# EAGLE board GameboyCartridgeKS (EAGLE 6.3)
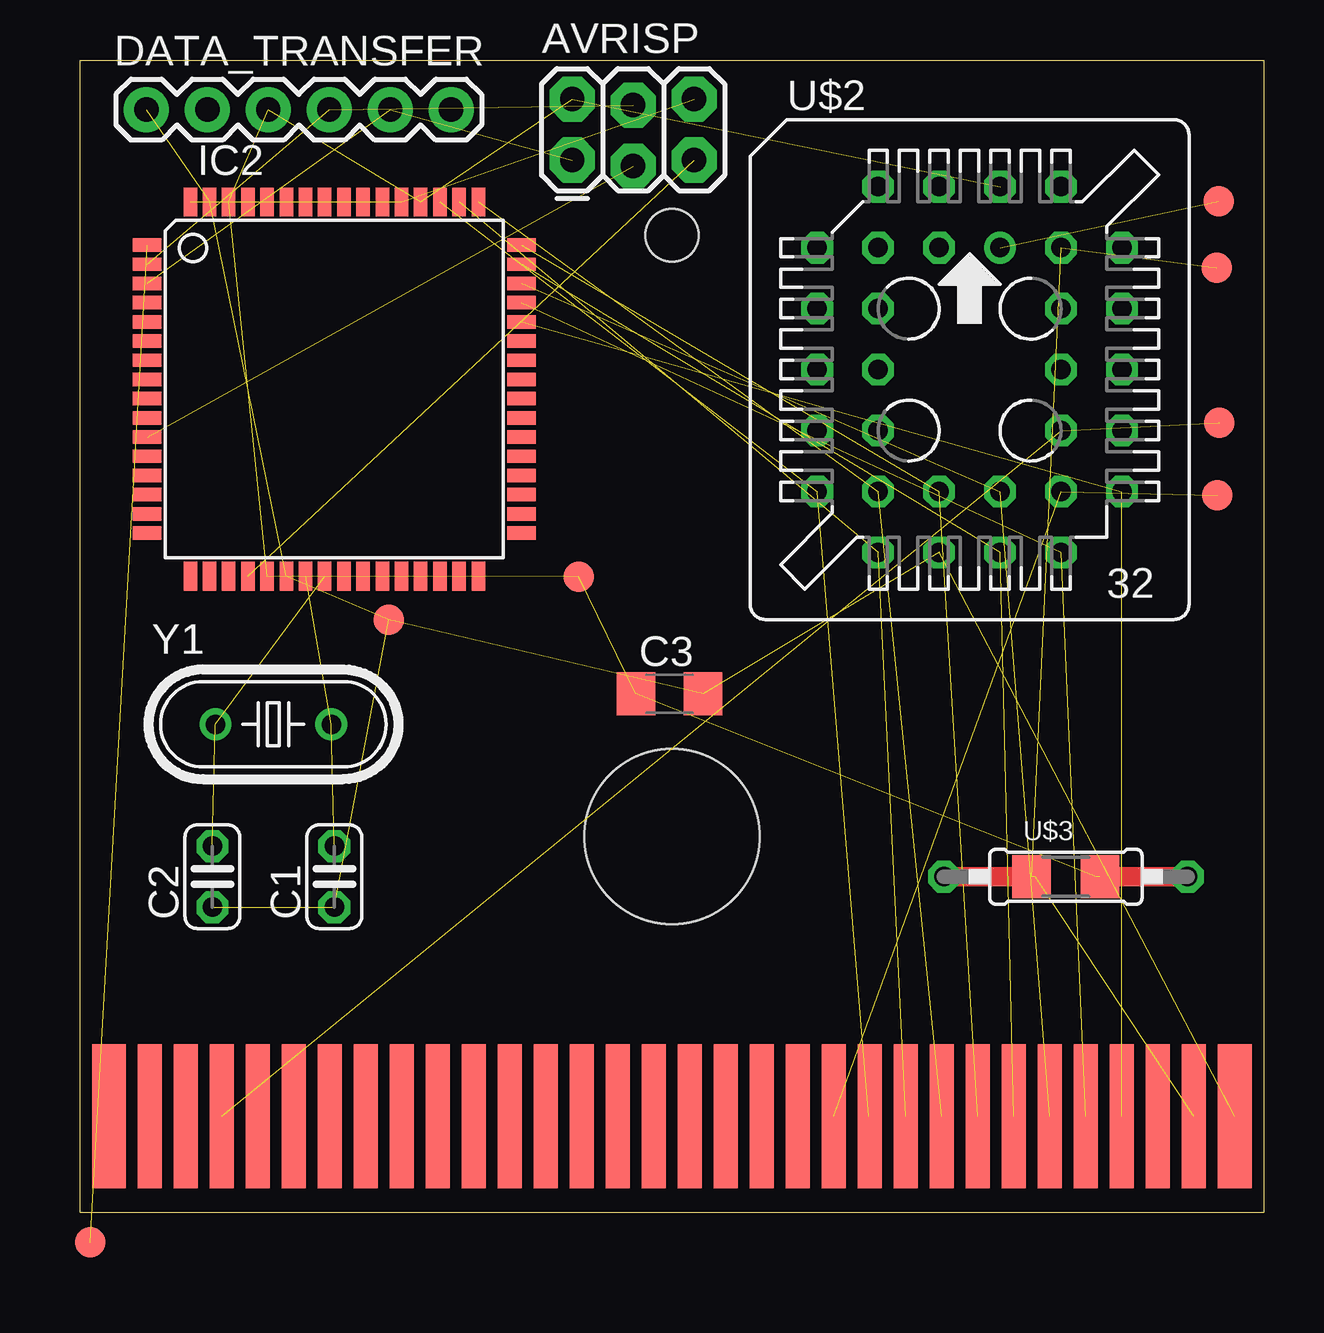
[diagram p0: board, top side]

Size 49.3 x 48 mm. Coordinates in mm from the lower left corner, seen from the top.
Outline: 49.3,48 49.3,0 0,0 0,48 49.3,48
Copper layers (1*16): Top 0.035mm / dielectric 1.5mm / Bottom 0.035mm
Design rules "default": minimum track width 6mil, minimum drill 12mil, track to track 6mil, track to pad 6mil, pad to pad 6mil, via to via 6mil, smd to smd 0mil, copper to edge 10mil, drill to drill 10mil, minimum pad ring 10mil, minimum via ring 6mil, stop-mask expansion 2mil, vias tented up to drill 100mil, thermal gap 10mil
Holes 7.3 mm at 24.65,15.65
Holes 2.2 mm at 24.65,40.7

## Footprints (pad centres in the part's own frame; a part is rotated, then mirrored left to right if it is on the bottom)
2X3_LOCK = drill 1.016 pad 1.88 octagon: 1 0,0; 2 0,2.54; 3 2.54,-0.254; 4 2.54,2.286; 5 5.08,0; 6 5.08,2.54
C025-024X044 = drill 0.813 octagon: 1 -1.27,0; 2 1.27,0
C1206 = smd 1.6 x 1.8: 1 -1.4,0; 2 1.4,0
1X06 = drill 1.016 pad 1.88: 1 0,0; 2 2.54,0; 3 5.08,0; 4 7.62,0; 5 10.16,0; 6 12.7,0
TQFP64 = smd 1.194 x 0.559: 1 -7.8,6; 2 -7.8,5.2; 3 -7.8,4.4; 4 -7.8,3.6; 5 -7.8,2.8; 6 -7.8,2; 7 -7.8,1.2; 8 -7.8,0.4; 9 -7.8,-0.4; 10 -7.8,-1.2; 11 -7.8,-2; 12 -7.8,-2.8; 13 -7.8,-3.6; 14 -7.8,-4.4; 15 -7.8,-5.2; 16 -7.8,-6; 33 7.8,-6; 34 7.8,-5.2; 35 7.8,-4.4; 36 7.8,-3.6; 37 7.8,-2.8; 38 7.8,-2; 39 7.8,-1.2; 40 7.8,-0.4; 41 7.8,0.4; 42 7.8,1.2; 43 7.8,2; 44 7.8,2.8; 45 7.8,3.6; 46 7.8,4.4; 47 7.8,5.2; 48 7.8,6 | smd 0.559 x 1.194: 17 -6,-7.8; 18 -5.2,-7.8; 19 -4.4,-7.8; 20 -3.6,-7.8; 21 -2.8,-7.8; 22 -2,-7.8; 23 -1.2,-7.8; 24 -0.4,-7.8; 25 0.4,-7.8; 26 1.2,-7.8; 27 2,-7.8; 28 2.8,-7.8; 29 3.6,-7.8; 30 4.4,-7.8; 31 5.2,-7.8; 32 6,-7.8; 49 6,7.8; 50 5.2,7.8; 51 4.4,7.8; 52 3.6,7.8; 53 2.8,7.8; 54 2,7.8; 55 1.2,7.8; 56 0.4,7.8; 57 -0.4,7.8; 58 -1.2,7.8; 59 -2,7.8; 60 -2.8,7.8; 61 -3.6,7.8; 62 -4.4,7.8; 63 -5.2,7.8; 64 -6,7.8
PAD.03X.05 = smd 1.27 x 1.27: P$1 0,0
CONNECTOR = smd 1.4 x 6: 1 0.7,-3; 32 47.6,-3 | smd 1 x 6: 2 2.4,-3; 3 3.9,-3; 4 5.4,-3; 5 6.9,-3; 6 8.4,-3; 7 9.9,-3; 8 11.4,-3; 9 12.9,-3; 10 14.4,-3; 11 15.9,-3; 12 17.4,-3; 13 18.9,-3; 14 20.4,-3; 15 21.9,-3; 16 23.4,-3; 17 24.9,-3; 18 26.4,-3; 19 27.9,-3; 20 29.4,-3; 21 30.9,-3; 22 32.4,-3; 23 33.9,-3; 24 35.4,-3; 25 36.9,-3; 26 38.4,-3; 27 39.9,-3; 28 41.4,-3; 29 42.9,-3; 30 44.4,-3; 31 45.9,-3
PLCC-S32 = drill 0.813: 1 1.27,5.08 | drill 0.813 octagon: 2 -1.27,7.62; 3 -1.27,5.08; 4 -3.81,7.62; 5 -6.35,5.08; 6 -3.81,5.08; 7 -6.35,2.54; 8 -3.81,2.54; 9 -6.35,0; 10 -3.81,0; 11 -6.35,-2.54; 12 -3.81,-2.54; 13 -6.35,-5.08; 14 -3.81,-7.62; 15 -3.81,-5.08; 16 -1.27,-7.62; 17 -1.27,-5.08; 18 1.27,-7.62; 19 1.27,-5.08; 20 3.81,-7.62; 21 6.35,-5.08; 22 3.81,-5.08; 23 6.35,-2.54; 24 3.81,-2.54; 25 6.35,0; 26 3.81,0; 27 6.35,2.54; 28 3.81,2.54; 29 6.35,5.08; 30 3.81,7.62; 31 3.81,5.08; 32 1.27,7.62
207-10_SMD_COMBO = drill 0.813 octagon: 1 -5.08,0; 2 5.08,0 | smd 1.6 x 1.803: 3 1.422,0; 4 -1.422,0
HC49U-V = drill 0.813: 1 -2.413,0; 2 2.413,0

## Placement (x,y rotation side)
AVRISP  AVR_SPI_PRG_62X3_LOCK  [2X3_LOCK]  20.49,43.83 0 top
C1  22pF  [C025-024X044]  10.58,13.97 90 top
C2  22pF  [C025-024X044]  5.5,13.97 90 top
C3  10uF  [C1206]  24.55,21.59 0 top
DATA_TRANSFER  [1X06]  2.75,45.93 0 top
IC2  MEGA64-A  [TQFP64]  10.58,34.29 0 top
PEN  TEST-POINT3X5  [PAD.03X.05]  0.42,-1.27 0 top
TP1  TEST-POINT3X5  [PAD.03X.05]  47.37,29.86 0 top
TP2  TEST-POINT3X5  [PAD.03X.05]  47.45,32.89 0 top
TP3  TEST-POINT3X5  [PAD.03X.05]  47.34,39.34 0 top
TP4  TEST-POINT3X5  [PAD.03X.05]  47.42,42.11 0 top
TP5  TEST-POINT3X5  [PAD.03X.05]  20.77,26.47 0 top
TP6  TEST-POINT3X5  [PAD.03X.05]  12.85,24.67 0 top
U$1  CONNECTOR  [CONNECTOR]  0.5,7 0 top
U$2  EN29F002T  [PLCC-S32]  37.05,35.1 0 top
U$3  RESISTOR_COMBO1206  [207-10_SMD_COMBO]  41.06,13.97 0 top
Y1  16MHz max  [HC49U-V]  8.04,20.32 0 top

## Library data of the parts
AVRISP = SparkFun-Connectors
C1-C3 = resistor
DATA_TRANSFER = SparkFun-Connectors; PROD_ID: CONN-08437
IC2 = atmel; MPN: ATMEGA64-16AU; OC_FARNELL: 9171355; OC_NEWARK: 01M6899
PEN TP1-TP6 = SparkFun-Passives
U$1 = gameboy
U$2 U$3 = kalshagar
Y1 = SparkFun-FreqCtrl

## Nets
3: U$1.3
5: U$1.5
6: U$1.6
7: U$1.7
8: U$1.8
9: U$1.9
10: U$1.10
11: U$1.11
12: U$1.12
13: U$1.13
14: U$1.14
15: U$1.15
16: U$1.16
17: U$1.17
18: U$1.18
19: U$1.19
20: U$1.20
22: IC2.51 U$1.22 U$2.13
23: IC2.50 U$1.23 U$2.14
24: IC2.49 U$1.24 U$2.15
25: IC2.48 U$1.25 U$2.17
26: IC2.47 U$1.26 U$2.18
27: IC2.46 U$1.27 U$2.19
28: IC2.45 U$1.28 U$2.20
29: IC2.44 U$1.29 U$2.21
30: U$1.30
!CE: TP1.P$1 U$1.21 U$2.22
!OE: TP2.P$1 U$1.4 U$2.24
!RESET: TP4.P$1 U$2.1
!WE: TP3.P$1 U$1.31 U$2.31 U$3.1 U$3.4
CTS: DATA_TRANSFER.2
DTR: DATA_TRANSFER.6
GND: AVRISP.6 C1.1 C2.1 C3.2 DATA_TRANSFER.1 IC2.22 IC2.53 IC2.63 TP6.P$1 U$1.32 U$2.16
MISO_TX: AVRISP.1 DATA_TRANSFER.5 IC2.3
MOSI_RX: AVRISP.4 DATA_TRANSFER.4 IC2.2
N$2: C1.2 IC2.23 Y1.2
N$3: AVRISP.5 IC2.20
N$4: C2.2 IC2.24 Y1.1
PEN: IC2.1 PEN.P$1
SCK: AVRISP.3 IC2.11
VCC: AVRISP.2 C3.1 DATA_TRANSFER.3 IC2.21 IC2.52 IC2.62 IC2.64 TP5.P$1 U$2.32 U$3.2 U$3.3
VDD: U$1.1

## Tracks (layer width: path | path; a pad name or v marks a point on that pad's centre or on a via)
11
  Top 0.152: 16.45,4 U$1.11
20
  Top 0.152: 29.95,4 U$1.20
22  (2 unrouted)
  Top 0.152: 32.85,4 U$1.22
23  (2 unrouted)
24  (2 unrouted)
25  (2 unrouted)
26  (2 unrouted)
27  (2 unrouted)
28  (2 unrouted)
29  (2 unrouted)
  Top 0.152: 43.35,4 U$1.29
!CE  (2 unrouted)
!OE  (2 unrouted)
!RESET  (1 unrouted)
!WE  (4 unrouted)
GND  (10 unrouted)
MISO_TX  (2 unrouted)
MOSI_RX  (2 unrouted)
N$2  (2 unrouted)
N$3  (1 unrouted)
N$4  (2 unrouted)
PEN  (1 unrouted)
SCK  (1 unrouted)
VCC  (10 unrouted)